# Altium PCB Greenhouse.PcbDoc (part 2 of 2)
Units mil, origin at the board's own origin, x right, y up, seen from the top; angles counter-clockwise.
Board outline 3900 x 3775 mil, 2 copper layers (Top Layer, Bottom Layer); 118 components, 76 nets, 461 pads, 55 vias.
Unrouted connection lines stored in the file: 2.
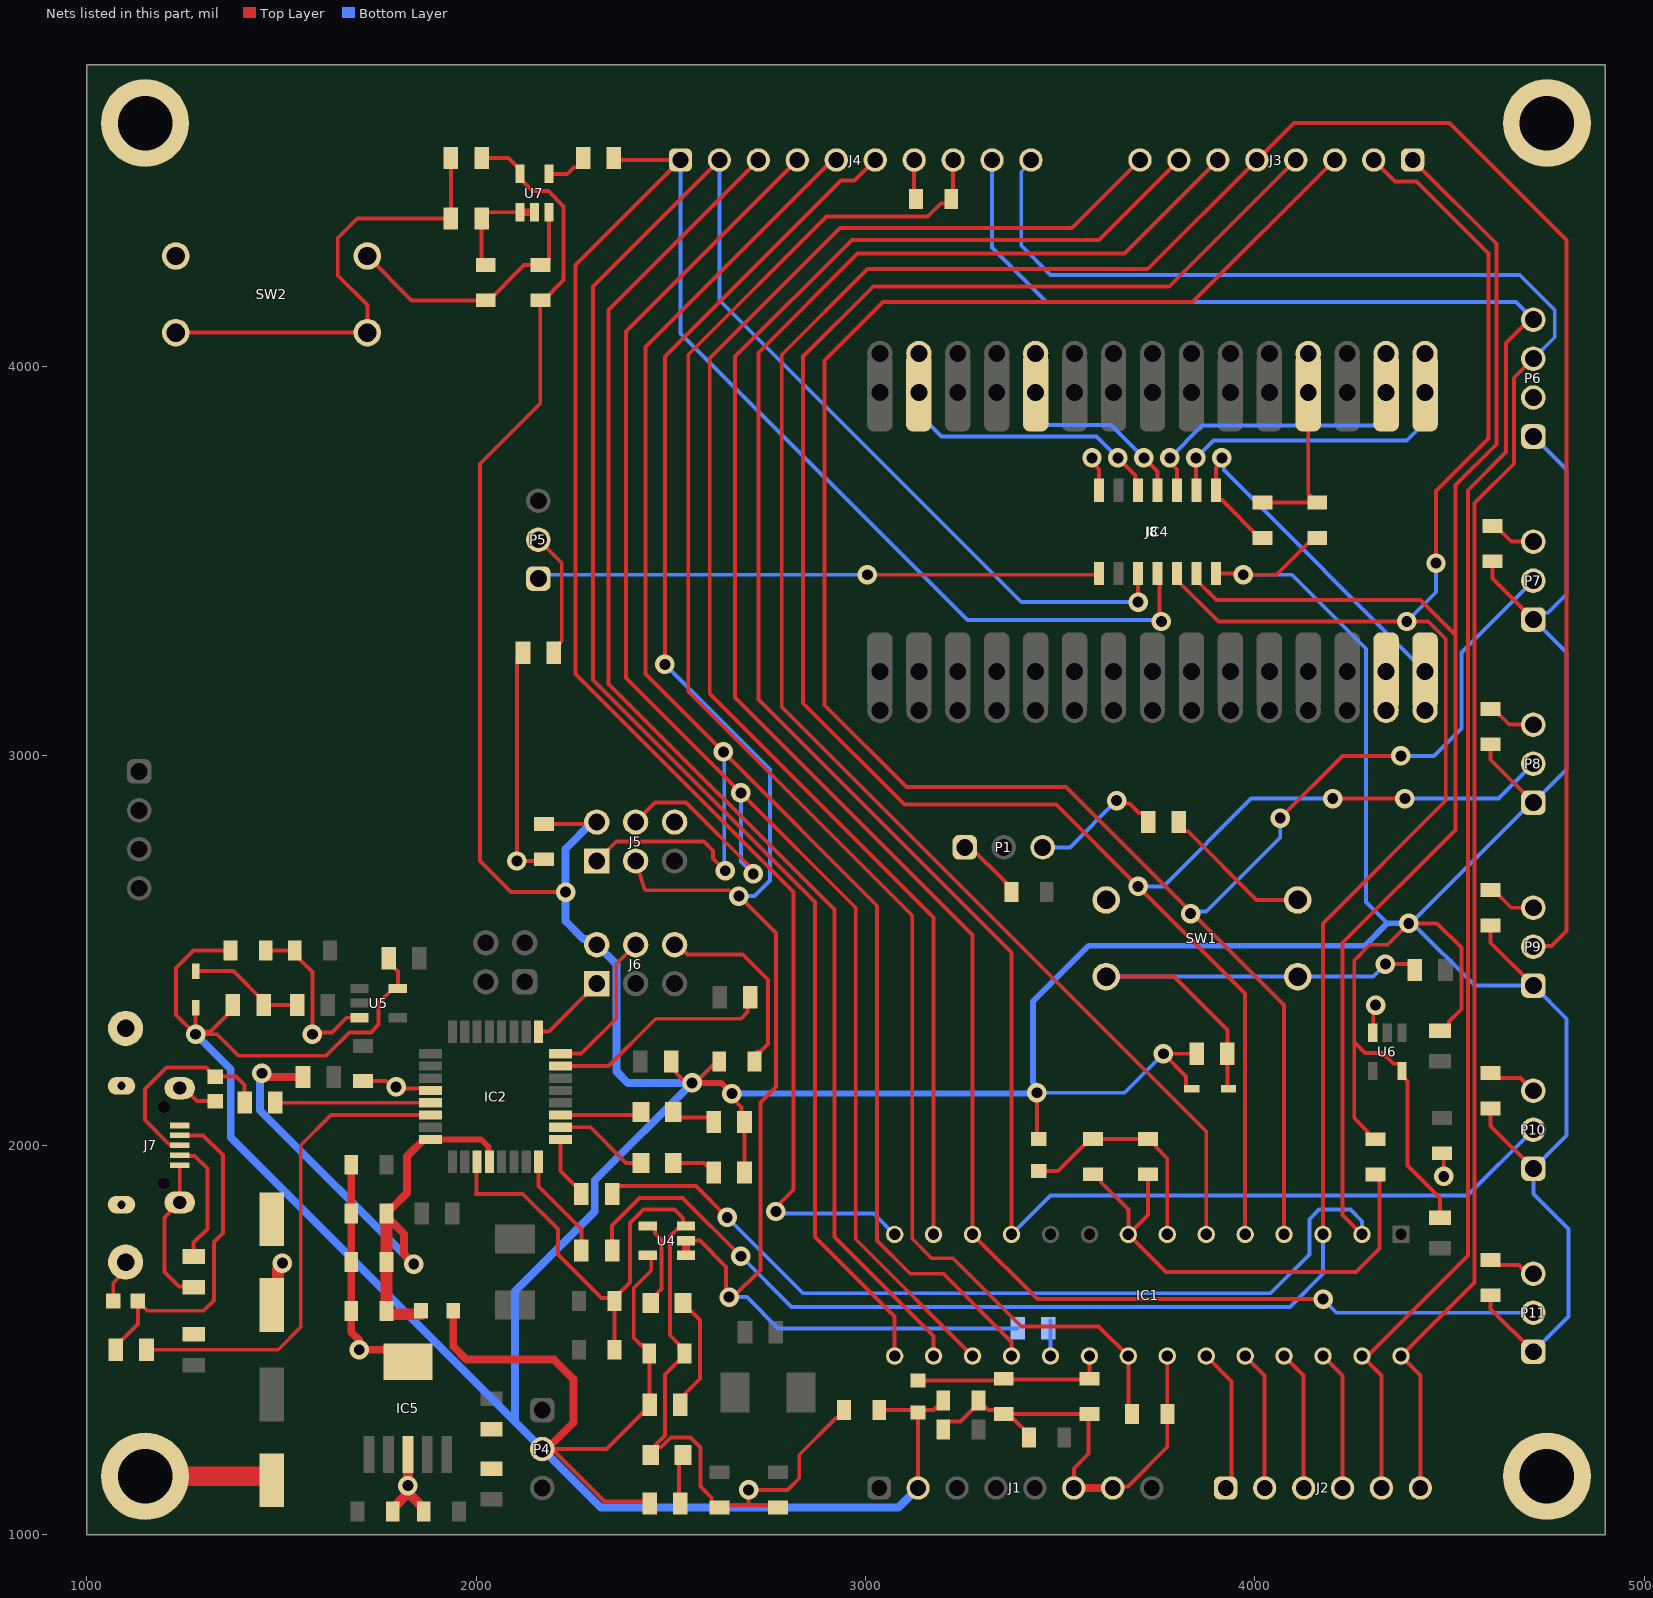
[diagram p2: the nets of this part, all layers, seen from the top]

## Via types
v1: diameter 50, hole 28, Top Layer to Bottom Layer, 55 vias

## Nets (pads, with @x,y where several pads share a name; then routed paths per layer and width w, separated by ;. In a path a pad name is that pad's centre, name@x,y a point inside that pad or via, vN(x,y) a via of type N, cw(c..) or ccw(c..) an arc to the next point about the centre after c; other vN are vias at no path point) (continued)
+5V/3V3: C8.2 C15.2 C17.1 C26.2 C28.2 C29.2 C30.2 C34.2 C35.2 C37.2 C38.2 C39.2 C40.2 C41.2 D5.1 D6.1 FB1.1 FB2.1 FB3.1 IC4.14 J1.2 J5.02 J6.02 P4.2 P6.1 P7.1 P8.1 P9.1 P10.1 P11.1 R1.1 R2.1 R3.1 R4.1 R14.2 R15.1 R17.1 R18.2 R19.2 R20.2 R21.2 R27.1 R28.2 U4.5 U5.5 U6.5 U7.5 | length 20581.8
  Top Layer w10: D5.1@1280,2339.53 v1(1280,2285) ; C30.2@1369.72,2500 1275,2500 1230,2455 1230,2335 v1(1280,2285) ; R19.2@1375.63,2360 1375.63,2350.16 1318.13,2292.65 1287.65,2292.65 v1(1280,2285) ; R4.1@1775.63,2480 1775.63,2470.16 1799.21,2446.57 U5.5@1799.21,2402.4 1787.4,2402.4 1749.87,2364.87 1749.87,2309.87 1730,2290 1675,2290 1615,2230 1390,2230 1335,2285 v1(1280,2285) ; R21.2@2014.37,4535 2083.62,4535 2112.6,4506.02 U7.5@2112.6,4494.21 2112.6,4482.4 2145.01,4449.99 2185.61,4449.99 2225,4410.59 2225,4221.85 2172.87,4169.72 C29.2@2165,4169.72 2165,3905 2010,3750 2010,2730 2090,2650 v1(2230,2650) ; P4.2@2170,1220 P4.2@2195,1220 ; C17.1@2175,2825.28 2270.28,2825.28 ; 2255,2825 2305,2825 J5.02@2310,2830 J5.02@2310,2844.87 ; U4.5@2440.79,1717.6 2443.19,1717.6 2450,1710.79 2450,1678.56 2405,1633.56 2405,1505.63 2425.04,1485.59 2432.01,1485.59 2445.63,1471.97 R15.1@2445.63,1333.56 2445.63,1330.16 2335.47,1220 P4.2@2195,1220 ; R17.1@2442.18,1085 2330,1085 P4.2@2195,1220 ; R1.1@2504.37,2208.7 2504.37,2195.16 v1@2531.87,2167.65 ; v1(2555,2160) 2562.6,2160 2614.72,2212.13 C8.2@2614.72,2220 ; v1@2664.84,2114.34 2681.49,2097.69 2681.49,2077.72 2689.37,2069.84 R2.1@2689.37,2060 R3.1@2689.37,1930 ; C34.2@3035.28,1320 3128.66,1320 FB3.1@3135,1313.66 3141.34,1320 3174.72,1320 C15.2@3199.72,1345 ; J1.2@3135,1120 FB3.1@3135,1303.66 ; v1(3440,2135) 3440,2021.34 FB2.1@3445,2016.34 ; D6.1@3837.76,2145 3827.91,2145 3823.07,2149.84 3823.07,2176.93 v1(3765,2235) R20.2@3850.63,2235 ; IC4.14@3907.8,3493.25 3900,3485.45 IC4.14@3900,3468.23 v1@3988.78,3468.23 ; v1(3970,3465) 4055,3465 4137.01,3547.01 4147.28,3547.01 C35.2@4160,3559.72 ; C28.2@4310,2015.28 4302.13,2015.28 4289.41,2027.99 4289.41,2035.87 4255,2070.28 4255,2265 ; R14.2@4475,1814.37 4475,1865 4392,1948 4392,2164.38 4377.4,2178.98 U6.5@4377.4,2190.79 4377.4,2202.6 4370.59,2209.41 4355.59,2209.41 4327.8,2237.2 4282.8,2237.2 4255,2265 ; R18.2@4475,2294.37 4484.84,2294.37 4498.54,2308.07 4498.54,2317.91 4530,2349.37 4530,2508 4468,2570 v1(4395,2570) 4340,2515 4295,2515 4255,2475 4255,2265 ; C41.2@4605,1614.72 4605,1580 P11.1@4715,1470 ; C40.2@4605,2094.72 4605,2050 P10.1@4715,1940 ; C39.2@4605,2564.72 4605,2520 P9.1@4715,2410 ; C38.2@4605,3029.72 4605,2990 P8.1@4715,2880 ; C37.2@4610,3499.72 4610,3455 P7.1@4715,3350
  Top Layer w15: v1@2562.6,2160 2630,2160 v1(2657.19,2132.82)
  Top Layer w20: FB1.1@1941.34,1575 1941.34,1483.66 1975,1450 2200,1450 2250,1400 2250,1287.5 2199.73,1237.23
  Bottom Layer w10: v1(3440,2135) 3665,2135 v1(3765,2235) ; v1(3970,3465) 4095,3465 4285,3275 4285,2625 4340,2570 ; v1(4395,2570) v1@4400,2570 ; P11.1@4715,1470 4805,1560 4805,1785 4715,1875 P10.1@4715,1940 4800,2025 4800,2325 P9.1@4715,2410 4565,2410 4405,2570 v1@4400,2570 ; P6.1@4715,3820 4800,3735 4800,3415 4752.49,3367.49 4732.49,3367.49 P7.1@4715,3350 4800,3265 4800,2965 P8.1@4715,2880 4710,2880 v1@4400,2570
  Bottom Layer w15: v1(2657.19,2132.82) v1@3440,2132.82 ; v1(3440,2135) 3433.3,2141.7 3433.3,2157.98 3430,2161.29 3430,2370 3572.5,2512.5 4282.5,2512.5 4340,2570 v1(4395,2570)
  Bottom Layer w20: v1(1280,2285) 1370,2195 1370,2020 2100,1290 ; J5.02@2310,2830 2298.51,2830 2230,2761.49 v1(2230,2650) 2230,2575.45 2276.05,2529.41 2283.43,2529.41 2297.83,2515 J6.02@2310,2515 2360.52,2464.48 2360.52,2189.48 2390,2160 v1(2555,2160) 2305,1910 2305,1830 2100,1625 2100,1290 ; J1.2@3135,1120 3085,1070 2320,1070 P4.2@2170,1220 2100,1290
+5V/3V3_16U2: C3.2 C4.2 C5.2 FB1.2 IC2.4 IC2.32 R26.2 | length 1691.4
  Top Layer w10: C3.2@1770.28,1575 C3.2@1778.94,1566.34 ; C5.2@1770.28,1817.13 C5.2@1770.28,1825 ; IC2.4@2031.9,1974.12 2041.06,1964.96 IC2.4@2034.25,1958.15
  Top Layer w15: IC2.32@1883.15,2014.76 2013.47,2014.76 2031.9,1996.33 IC2.4@2031.9,1974.12
  Top Layer w20: v1(1450,2185) 1458.12,2185 1468.12,2175 R26.2@1555.63,2175 ; C5.2@1770.28,1817.13 1815,1772.4 1815,1721.72 1840,1696.72 v1(1840,1695) ; C5.2@1770.28,1825 1770.28,1832.87 1777.99,1840.59 1785.87,1840.59 1822.8,1877.53 1822.8,1971.64 1864.11,2012.95 1881.34,2012.95 IC2.32@1883.15,2014.76
  Top Layer w30: C3.2@1770.28,1575 C4.2@1770.28,1700 1770.28,1797.64 ; C3.2@1778.94,1566.34 FB1.2@1858.66,1566.34
  Bottom Layer w20: v1(1450,2185) 1445,2180 1445,2090 v1(1840,1695)
+5V/3V3_328P_AVCC: C22.2 C23.2 FB3.2 IC1.20 | length 512.9
  Top Layer w10: FB3.2@3135,1396.34 3351.06,1396.34 C22.2@3353.03,1398.31 ; C22.2@3355,1400.28 C22.2@3353.03,1398.31 ; C23.2@3575,1390.28 IC1.20@3575,1458.74 ; C23.2@3575,1400.28 3573.03,1398.31 C22.2@3353.03,1398.31
+5V/3V3_328P_VCC: C19.2 C20.2 FB2.2 IC1.7 | length 584.6
  Top Layer w10: FB2.2@3445,1933.66 3493.96,1933.66 3576.63,2016.34 C19.2@3584.51,2016.34 C20.2@3725,2016.34 3732.87,2016.34 3745.59,2003.62 3745.59,1995.75 3775,1966.34 IC1.7@3775,1771.26
+5V_USB: C1.1 J7.1 L1.1 | length 25.5
  Top Layer w20: L1.1@1275,1514.37 1284.84,1514.37 L1.1@1293.54,1523.07 ; C1.1@1472.62,1807.86 C1.1@1475,1810.24
+AREF: C21.2 C24.1 IC1.21 J4.8 | length 4292
  Top Layer w10: C21.2@3220.28,4430 3208.69,4418.42 3193.42,4418.42 3160,4385 2900,4385 2545,4030 2545,3165 3120,2590 3120,1760 3170,1710 3225,1710 3400,1535 3598.74,1535 IC1.21@3675,1458.74 3675,1319.72 C24.1@3684.72,1310 ; C21.2@3225,4419.72 3225,4430 J4.8@3225,4530
AD0: IC1.23 J2.1 | length 371.9
  Top Layer w10: IC1.23@3875,1458.74 3940,1393.74 3940,1135 J2.1@3925,1120
AD1: IC1.24 J2.2 | length 359.5
  Top Layer w10: IC1.24@3975,1458.74 4025,1408.74 J2.2@4025,1120
AD2: IC1.25 J2.3 | length 359.5
  Top Layer w10: IC1.25@4075,1458.74 4125,1408.74 J2.3@4125,1120
AD3: IC1.26 J2.4 | length 359.5
  Top Layer w10: IC1.26@4175,1458.74 4225,1408.74 J2.4@4225,1120
AD4/SDA: IC1.27 J2.5 J4.9 P6.4 | length 4908.5
  Top Layer w10: J2.5@4325,1120 4325,1408.74 IC1.27@4275,1458.74 4281.62,1465.36 4295.36,1465.36 4547,1717 4547,3682 4645,3780 4645,4060 4705,4120 P6.4@4715,4120
  Bottom Layer w10: J4.9@3325,4530 3325,4305 3465,4165 4670,4165 P6.4@4715,4120
AD5/SCL: IC1.28 J2.6 J4.10 P6.3 | length 4878.6
  Top Layer w10: J2.6@4425,1120 4425,1408.74 IC1.28@4375,1458.74 4564,1647.74 4564,3649 4665,3750 4665,3970.96 4714.04,4020 P6.3@4715,4020
  Bottom Layer w10: J4.10@3425,4530 3425,4524.76 3400,4499.76 3400,4310 3475,4235 4680,4235 4770,4145 4770,4075 P6.3@4715,4020
BUTTON_RESETn: D6.2 R20.1 R24.1 SW1.B1 SW1.B2 | length 1333.6
  Top Layer w10: SW1.B1@3617.87,2433.15 3791.85,2433.15 3929.37,2295.63 R20.1@3929.37,2235 3929.37,2147.87 D6.2@3932.24,2145 ; v1(4335,2465) 4396.93,2465 4410.63,2451.3 R24.1@4410.63,2450
  Bottom Layer w10: SW1.B1@3617.87,2433.15 SW1.B2@4110,2433.15 4303.89,2433.15 4335,2464.26 v1(4335,2465)
CON_USB_N: IC2.30 J7.2 R6.1 R6.2 VR1.2 | length 2166.7
  Top Layer w10: R6.1@1060.63,1489.37 R6.1@1075,1475 1075,1484.84 1131.5,1541.34 VR1.2@1131.5,1599.02 ; VR1.2@1131.5,1600 VR1.2@1131.5,1599.02 ; R6.2@1139.37,1475 R6.2@1153.74,1475 1492,1475 1550,1533 1550,2000 1627.76,2077.76 IC2.30@1883.15,2077.76 ; J7.2@1239.17,2025.59 1299.41,2025.59 1350,1975 1350,1775 1326.79,1751.79 1326.79,1601.79 1300,1575 1156.5,1575 1146.18,1585.31 1145.2,1585.31 VR1.2@1131.5,1599.02
CON_USB_P: IC2.29 J7.3 R7.1 R7.2 VR2.2 | length 937.6
  Top Layer w10: J7.3@1239.17,2000 1236.67,2002.5 1212.29,2002.5 1150,2064.79 1150,2145 1205,2200 1306.5,2200 1315.31,2191.18 1315.31,2190.2 1329.02,2176.5 1383.5,2176.5 1405.63,2154.37 R7.1@1405.63,2110 ; R7.2@1484.37,2110 1485.12,2109.25 IC2.29@1883.15,2109.25
GND: C1.2 C2.2 C3.1 C4.1 C5.1 C6.1 C7.1 C8.1 C9.1 C10.1 C12.1 C13.1 C14.1 C15.1 C16.1 C17.2 C19.1 C20.1 C21.1 C22.1 C23.1 C24.2 C25.1 C26.1 C27.1 C28.1 C29.1 C30.1 C31.1 C32.1 C33.1 C34.1 C35.1 C36.2 C37.1 C38.1 C39.1 C40.1 C41.1 D1.1 IC1.8 IC1.22 IC2.3 IC2.28 IC4.7 IC5.3 IC5.6 J1.6 J1.7 J4.7 J5.06 J6.06 J7.5 J7.Shell J8.6 MH1.1 MH2.1 MH3.1 MH4.1 MS1.1 MS2.1 P6.2 P7.3 P8.3 P9.3 P10.3 P11.3 R8.1 R12.1 R29.1 SW1.A1 SW1.A2 SW2.A1 SW2.A2 U4.3 U5.3 U6.3 U7.3 VR1.1 VR2.1 | length 11367.5
  Top Layer w10: VR1.1@1068.5,1600 1068.5,1646.86 1100,1678.35 MS1.1@1100,1700 ; MS2.1@1100,2300 MS2.1@1100,2321.65 ; J7.5@1239.17,1948.82 J7.Shell@1239.17,1853.35 1200,1814.17 1200,1675 1237.31,1637.69 1272.94,1637.69 R8.1@1275,1635.63 ; J7.Shell@1239.17,2146.65 1250,2146.65 1283.15,2113.5 VR2.1@1330,2113.5 ; C30.1@1460.28,2500 C31.1@1534.72,2500 1547.44,2487.28 1547.44,2477.56 1580,2445 v1(1580,2285) 1584.8,2289.8 1629.8,2289.8 1667.6,2327.6 U5.3@1700.79,2327.6 ; C2.2@1473.5,1150 1475,1148.5 C2.2@1475,1139.76 C2.2@1479.37,1144.13 ; C1.2@1475,1589.76 C1.2@1485.24,1600 ; v1(1700,1475) 1700,1500 ; C7.1@1710,2164.72 1769.45,2164.72 1784.18,2150 v1(1795,2150) 1799.63,2145.37 1878.52,2145.37 IC2.28@1883.15,2140.75 ; SW2.A2@1721.06,4283.43 1834.76,4169.72 C33.1@2025,4169.72 2032.87,4169.72 2123.43,4260.28 C29.1@2165,4260.28 2172.87,4260.28 2187.4,4274.8 U7.3@2187.4,4395.79 ; C12.1@1786.28,1060 C12.1@1786.28,1067.87 ; IC5.6@1794.09,1475 IC5.6@1825,1444.09 ; 1817.35,1098.94 1817.35,1118.35 v1(1825,1126) 1832.65,1118.35 1832.65,1100.94 ; C13.1@1865.72,1060 C13.1@1865.72,1067.87 ; IC2.3@2002.76,1958.15 2001.38,1956.77 2001.38,1876.38 2000,1875 2120,1875 2210,1785 2210,1720 2322,1608 2347.28,1608 C9.1@2355.28,1600 ; R29.1@2120.63,3265 2106.93,3251.3 2106.93,3237.53 2105,3235.6 v1(2105,2730) C17.2@2170.28,2730 ; C10.1@2355.28,1475 C9.1@2355.28,1600 ; D1.1@2443.66,1210 2443.66,1213.94 2485,1255.28 2485,1411.85 2535.28,1462.13 C26.1@2535.28,1465 2522.56,1477.72 2522.56,1487.44 2497.68,1512.32 2497.68,1765.88 2517.4,1785.59 2520.59,1785.59 2527.4,1792.4 U4.3@2538.46,1792.4 ; D1.1@2448.66,1205 2448.66,1208.94 2465.32,1225.59 2475.59,1225.59 2500,1250 2550.55,1250 2576.2,1224.35 2576.2,1123.8 2605.38,1094.62 2605.38,1082.44 2618.09,1069.72 C27.1@2625,1069.72 2627.64,1072.36 2630.28,1075 2700,1075 ; J6.06@2510,2515 2518.34,2515 2543.34,2490 2685,2490 2750,2425 2750,2259.72 2730.87,2240.59 2722.99,2240.59 ; U4.3@2539.21,1792.4 U4.3@2538.46,1792.4 ; C25.1@2775,1069.72 2769.72,1075 2700,1075 ; C34.1@2944.72,1320 2944.72,1312.13 2932.01,1299.41 2924.13,1299.41 2830,1205.28 2830,1145 2800,1115 v1(2700,1115) 2700,1075 ; J4.7@3125,4530 3125,4419.72 C21.1@3129.72,4415 ; C16.1@3199.72,1270 3199.72,1277.87 3212.44,1290.59 3243.74,1290.59 3290.28,1337.13 C15.1@3290.28,1345 3315.28,1320 3344.72,1320 C22.1@3355,1309.72 3367.72,1297.01 3380.59,1297.01 3419.72,1257.87 C14.1@3419.72,1250 ; C22.1@3355,1310 C23.1@3572.87,1310 ; J1.6@3535,1120 3535,1170 3572.87,1207.87 C23.1@3572.87,1300 ; v1(3581.67,3765) 3581.67,3754.18 3600,3735.84 IC4.7@3600,3681.77 ; C19.1@3584.51,1925.79 3592.38,1925.79 3605.1,1913.07 3605.1,1905.2 3675,1835.3 IC1.8@3675,1771.26 ; J1.7@3635,1120 3639.06,1124.06 3674.06,1124.06 3775,1225 IC1.22@3775,1458.74 ; C20.1@3725,1925.79 3725,1821.26 IC1.8@3675,1771.26 ; R12.1@3804.37,2830 3804.37,2820.16 3818.07,2806.46 3827.91,2806.46 4004.37,2630 SW1.A2@4110,2630 ; C36.2@4020,3650.28 C35.1@4160,3650.28 4137.01,3673.27 J8.6@4137.01,3933.27 ; U6.3@4303.8,2300.41 v1@4303.8,2353.8 ; C28.1@4310,1924.72 4320,1914.72 4320,1735 4260,1675 3771.26,1675 IC1.8@3675,1771.26 ; C32.1@4480,1979.72 4485,1974.72 v1(4485,1920) ; C41.1@4605,1705.28 4617.72,1692.56 4678.1,1692.56 4700.66,1670 P11.3@4715,1670 ; C40.1@4605,2185.28 4610.28,2185.28 4615,2190 4615,2183.15 4625.59,2172.56 4681.8,2172.56 4714.36,2140 P10.3@4715,2140 ; C39.1@4605,2655.28 4612.87,2655.28 4658.15,2610 P9.3@4715,2610 ; C38.1@4605,3120.28 4612.87,3120.28 4653.15,3080 P8.3@4715,3080 ; C37.1@4610,3590.28 4617.87,3590.28 4658.15,3550 P7.3@4715,3550 ; C9.1@2355.28,1600 2355.28,1607.87 2395,1647.6 2395,1800 2430,1835 2510,1835 2531.65,1813.35 2531.65,1799.21 U4.3@2538.46,1792.4 ; 2722.99,2240.59 2710.28,2227.87 2710.28,2220 2722.99,2240.59
  Top Layer w20: C6.1@1679.72,1950 C5.1@1679.72,1825 C4.1@1679.72,1700 C3.1@1679.72,1575 1679.72,1520.28 1700,1500 ; v1(1700,1475) IC5.6@1794.09,1475 ; J1.6@3535,1120 J1.7@3635,1120
  Top Layer w25: C12.1@1786.28,1067.87 1817.35,1098.94 ; v1(1825,1126) IC5.3@1825,1205.91 ; 1832.65,1100.94 C13.1@1865.72,1067.87
  Top Layer w30: C1.2@1485.24,1600 1491.5,1606.26 1491.5,1680.83 1502.63,1691.96 v1(1502.63,1697.37)
  Top Layer w50: MH1.1@1150,1150 C2.2@1473.5,1150
  other v1: 4310,2360
IO0: IC1.2 IC4.13 J3.1 R10.2 | length 6012.2
  Top Layer w10: R10.2@2349.37,1875 2349.37,1881.3 2363.07,1895 2565,1895 v1(2645,1815) ; IC4.13@3850,3468.23 3850,3451 3901,3400 4425,3400 4515,3310 ; IC1.2@4275,1771.26 4225,1821.26 4225,2520 4515,2810 4515,3310 ; J3.1@4404.92,4530 4620,4314.92 4620,3800 4515,3695 4515,3310
  Bottom Layer w10: v1(2645,1815) 2840,1620 4040,1620 4140,1720 4140,1810 4165,1835 4245,1835 4275,1805 IC1.2@4275,1771.26
IO1: IC1.3 IC4.12 J3.2 R11.2 | length 6027.2
  Top Layer w10: R11.2@2349.37,1730 2349.37,1794.37 2420,1865 2530,1865 v1(2680,1715) ; IC4.12@3800,3468.23 3800,3451 3906,3345 v1(4390,3345) 4445,3345 4490,3300 4490,2885 4175,2570 IC1.3@4175,1771.26 ; J3.2@4304.92,4530 4359.92,4475 4415,4475 4600,4290 4600,3815 4465,3680 v1(4465,3495)
  Bottom Layer w10: v1(2680,1715) 2810,1585 4090,1585 4175,1670 IC1.3@4175,1771.26 ; v1(4390,3345) 4465,3420 v1(4465,3495)
IO2: IC1.4 J3.3 P7.2 | length 5876.5
  Top Layer w10: v1(4065,2840) 4225,3000 v1(4375,3000) ; IC1.4@4075,1771.26 4075,2360 3840,2595 v1(3835,2595) 3835,2600 3515,2920 3105,2920 2895,3130 2895,4015 3045,4165 3839.92,4165 J3.3@4204.92,4530
  Bottom Layer w10: v1(3835,2595) 3840,2600 3875,2600 4065,2790 v1(4065,2840) ; v1(4375,3000) 4460,3000 4530,3070 4530,3265 P7.2@4715,3450
IO3: IC1.5 J3.4 P8.2 | length 5571.9
  Top Layer w10: IC1.5@3975,1771.26 3975,2390 v1(3700,2665) 3490,2875 3100,2875 2840,3135 2840,4025 3020,4205 3779.92,4205 J3.4@4104.92,4530 ; v1(4200,2890) v1(4385,2890)
  Bottom Layer w10: v1(3700,2665) 3765,2665 3990,2890 v1(4200,2890) ; v1(4385,2890) 4625,2890 P8.2@4715,2980
IO4: IC1.6 J3.5 P9.2 | length 6972.5
  Top Layer w10: IC1.6@3875,1771.26 3875,2035 2785,3125 2785,4030 3005,4250 3724.92,4250 J3.5@4004.92,4530 4099.92,4625 4500,4625 4800,4325 4800,2550 4761.5,2511.5 4716.5,2511.5 P9.2@4715,2510
IO5: IC1.11 J3.6 P10.2 | length 5369.3
  Top Layer w10: IC1.11@3375,1771.26 3375,2495 2725,3145 2725,4035 2980,4290 3664.92,4290 J3.6@3904.92,4530
  Bottom Layer w10: IC1.11@3375,1771.26 3475,1871.26 4546.26,1871.26 P10.2@4715,2040
IO6: IC1.12 J3.7 P11.2 | length 5378.9
  Top Layer w10: J3.7@3804.92,4530 3599.92,4325 2965,4325 2665,4025 2665,3150 3275,2540 IC1.12@3275,1771.26 3441.26,1605 v1(4175,1605)
  Bottom Layer w10: v1(4175,1605) 4210,1570 P11.2@4715,1570
IO7: IC1.13 J3.8 | length 3803.1
  Top Layer w10: IC1.13@3175,1771.26 3175,2585 2600,3160 2600,4020 2935,4355 3529.92,4355 J3.8@3704.92,4530
IO8: IC1.14 IC4.11 J4.1 R22.2 | length 5679
  Top Layer w10: R22.2@2353.74,4535 2358.74,4530 J4.1@2525,4530 2255,4260 2255,3210 2815,2650 2815,1885.82 2770,1840.82 v1(2770,1830) ; IC4.11@3750,3468.23 3755,3463.23 3755,3350 v1(3760,3345)
  Bottom Layer w10: J4.1@2525,4530 2525,4085 3261.57,3348.43 3756.57,3348.43 v1(3760,3345) ; v1(2770,1830) 2775,1825 3021.26,1825 IC1.14@3075,1771.26
IO9: IC1.15 IC4.10 J4.2 | length 5356.1
  Top Layer w10: J4.2@2625,4530 2300,4205 2300,3195 2870,2625 2870,1765 3075,1560 IC1.15@3075,1458.74 ; v1(3700,3395) IC4.10@3700,3468.23
  Bottom Layer w10: J4.2@2625,4530 2625,4170 3400,3395 v1(3700,3395)
LVL_A1: IC4.2 J8.2 | length 804.2
  Top Layer w10: v1(3848.33,3765) 3849.17,3764.17 3849.17,3682.61 IC4.2@3850,3681.77 IC4.2@3850,3699
  Bottom Layer w10: v1(3848.33,3765) 3893.33,3810 4390,3810 4437.01,3857.01 J8.2@4437.01,3933.27
LVL_A2: IC4.3 J8.3 | length 745.9
  Top Layer w10: v1(3781.67,3765) 3781.67,3754.18 3800,3735.84 IC4.3@3800,3681.77
  Bottom Layer w10: v1(3781.67,3765) 3864.55,3847.88 4302.88,3847.88 4337.01,3882.01 J8.3@4337.01,3933.27
LVL_A3: IC4.4 J8.4 | length 474.9
  Top Layer w10: v1(3715,3765) 3750,3730 IC4.4@3750,3681.77
  Bottom Layer w10: J8.4@3437.01,3933.27 3437.01,3882.99 3470,3850 3630,3850 v1(3715,3765)
LVL_A4: IC4.5 J8.5 | length 718
  Top Layer w10: v1(3648.33,3765) 3676.8,3736.53 3693.77,3719.57 3693.77,3688 IC4.5@3700,3681.77
  Bottom Layer w10: J8.5@3137.01,3933.27 3137.01,3877.99 3195,3820 3593.33,3820 v1(3648.33,3765)
LVL_VCCA: C36.1 IC4.1 J8.1 | length 1034.6
  Top Layer w10: v1(3915,3765) 3915,3754.18 3900,3739.18 IC4.1@3900,3681.77 3900,3664.55 3907.8,3656.75 3915.1,3656.75 4012.13,3559.72 C36.1@4020,3559.72
  Bottom Layer w10: v1(3915,3765) 3920.15,3759.85 3920.15,3733.59 J8.1@4437.01,3216.73
MISO: IC1.18 J4.5 J5.01 | length 4419.8
  Top Layer w10: J5.01@2310,2730 2360,2780 2585,2780 2608.67,2756.33 2608.67,2736.33 v1(2640,2705) ; J4.5@2925,4530 2915,4530 2435,4050 2435,3210 v1(2635,3010) 3030,2615 3030,1755 3115,1670 3200,1670 3375,1495 IC1.18@3375,1458.74
  Bottom Layer w10: v1(2635,3010) 2637.5,3007.5 2637.5,2707.5 v1(2640,2705)
MOSI: IC1.17 J4.4 J5.04 | length 4248.3
  Top Layer w10: J5.04@2410,2830 2460,2880 2539.26,2880 2711.72,2707.54 v1(2711.72,2696.72) ; J4.4@2825,4530 2385,4090 2385,3200 v1(2680,2905) 2975,2610 2975,1758.74 IC1.17@3275,1458.74
  Bottom Layer w10: v1(2680,2905) 2680,2728.43 v1(2711.72,2696.72)
NetC11_1: C11.1 P1.1 | length 179
  Top Layer w10: P1.1@3262.5,2772.5 3362.01,2672.99 3362.01,2652.72 C11.1@3374.72,2640
NetD1_2: D1.2 R17.2 | length 127.2
  Top Layer w10: R17.2@2520.93,1085 2520.93,1204.59 D1.2@2526.34,1210
NetD2_1: D2.1 U4.4 | length 230.4
  Top Layer w10: U4.4@2440.79,1792.4 2452.3,1792.4 2459.11,1785.59 2459.11,1774.08 2476.41,1756.78 2476.41,1631.41 2465.32,1620.32 2465.32,1611.65 D2.1@2448.66,1595
NetD2_2: D2.2 R15.2 | length 296.4
  Top Layer w10: R15.2@2524.37,1340 2524.37,1349.84 2575,1400.47 2575,1551.34 2551.93,1574.41 2547.99,1574.41 2531.34,1591.06 D2.2@2531.34,1595
NetD3_1: D3.1 IC2.11 | length 209.8
  Top Layer w10: IC2.11@2216.85,2077.76 2416.42,2077.76 D3.1@2423.66,2085
NetD3_2: D3.2 R2.2 | length 114.6
  Top Layer w10: D3.2@2506.34,2085 2520.04,2071.3 2599.33,2071.3 R2.2@2610.63,2060
NetD4_1: D4.1 IC2.10 | length 244.6
  Top Layer w10: IC2.10@2216.85,2046.26 2293.74,2046.26 2385,1955 D4.1@2423.66,1955
NetD4_2: D4.2 R3.2 | length 114.6
  Top Layer w10: D4.2@2506.34,1955 2585.63,1955 R3.2@2610.63,1930
NetD5_2: D5.2 R19.1 R23.1 | length 329.1
  Top Layer w10: D5.2@1284.84,2461.93 1280,2457.09 D5.2@1280,2447.24 1376.97,2447.24 1454.37,2369.84 R19.1@1454.37,2360 R23.1@1540.63,2360 R23.1@1540.63,2369.84
NetIC2_8: IC2.8 R11.1 | length 279.2
  Top Layer w10: IC2.8@2160.24,1958.15 2160.24,1894.76 2270.63,1784.37 R11.1@2270.63,1730 ; R11.1@2266.86,1710.22 R11.1@2270.63,1706.46
NetIC2_9: IC2.9 R10.1 | length 167
  Top Layer w10: IC2.9@2216.85,2014.76 2216.85,1933.62 2270.63,1879.84 R10.1@2270.63,1870
NetIC2_15: IC2.15 R5.2 | length 578.5
  Top Layer w10: IC2.15@2216.85,2203.74 2340.16,2203.74 2461.42,2325 2680,2325 2697.31,2342.31 2697.31,2372.94 R5.2@2704.37,2380
NetIC2_16: IC2.16 J6.04 | length 391
  Top Layer w10: IC2.16@2216.85,2235.24 2270.24,2235.24 2360,2325 2360,2465 J6.04@2410,2515
NetIC2_17: IC2.17 J6.01 | length 200.8
  Top Layer w10: IC2.17@2160.24,2291.85 2186.85,2291.85 J6.01@2310,2415
NetIC4_8: IC4.8 P5.1 | length 1445.5
  Top Layer w10: v1(3005,3465) 3596.77,3465 IC4.8@3600,3468.23
  Bottom Layer w10: P5.1@2160,3455 2170,3465 v1(3005,3465)
NetJ7_4: J7.4 R8.2 | length 325.2
  Top Layer w10: J7.4@1239.17,1974.41 1241.36,1972.23 1277.77,1972.23 1310,1940 1310,1785 1275,1750 R8.2@1275,1714.37
NetP1_3: P1.3 R12.2 | length 348.9
  Top Layer w10: v1(3645,2885) 3652.65,2877.35 3678.28,2877.35 3702.09,2853.54 3711.93,2853.54 3725.63,2839.84 R12.2@3725.63,2830
  Bottom Layer w10: P1.3@3455,2765 3525,2765 v1(3645,2885)
NetP5_2: P5.2 R29.2 | length 324
  Top Layer w10: P5.2@2160,3555 2220,3495 2220,3294.4 2214.14,3288.54 2213.07,3288.54 2199.37,3274.84 R29.2@2199.37,3265
NetR22_1: R22.1 U7.4 | length 110.3
  Top Layer w10: U7.4@2187.4,4494.21 2234.21,4494.21 2251.46,4511.46 2261.3,4511.46 2275,4525.16 R22.1@2275,4535
SCK: J4.6 J5.03 R13.2 U4.1 U4.2 | length 4775.2
  Top Layer w10: J5.03@2410,2730 2432.21,2659.66 2436.87,2655 2649.18,2655 2664.18,2640 v1(2675,2640) 2770,2545 2770,2150 2730,2110 2730,1680 2660,1610 v1(2650,1610) 2642.35,1617.65 2642.35,1687.65 2575,1755 U4.2@2539.21,1755 ; v1(2485,3235) 2485,4025 2936.99,4476.99 2971.99,4476.99 J4.6@3025,4530
  Top Layer w20: U4.1@2539.21,1717.6 U4.2@2539.21,1755
  Bottom Layer w10: v1(2485,3235) 2755,2965 2755,2680 2715,2640 v1(2675,2640) ; v1(2650,1610) 2695.85,1610 2775.85,1530 R13.2@3390.63,1530
SCK_R: IC1.19 R13.1 | length 91.9
  Bottom Layer w10: IC1.19@3475,1458.74 R13.1@3475,1550.63
SS: IC1.16 J4.3 | length 3576.6
  Top Layer w10: J4.3@2725,4530 2658.74,4463.74 2340,4145 2340,3185 2920,2605 2920,1765 3175,1510 IC1.16@3175,1458.74
USER_BUTTON: R21.1 R25.1 SW2.B1 SW2.B2 | length 1233.4
  Top Layer w10: SW2.B1@1228.94,4086.57 SW2.B2@1721.06,4086.57 1721.06,4157.63 1645,4233.7 1645,4330 1695,4380 R25.1@1935.63,4380 R21.1@1935.63,4535
USER_BUTTON_BUF: C33.2 R25.2 U7.1 U7.2 | length 267.5
  Top Layer w10: C33.2@2025,4260.28 2014.37,4270.91 R25.2@2014.37,4380 2014.37,4382.09 2028.07,4395.79 U7.1@2112.6,4395.79
  Top Layer w20: U7.1@2112.6,4395.79 U7.2@2150,4395.79
pads on no net: IC2.5 IC2.6 IC2.7 IC2.12 IC2.14 IC2.22 IC2.23 IC2.25 IC2.26 IC4.6 IC4.9 J1.1 J1.8 J7.MH1 J7.MH2 J8. P5.3

## Polygon pours and split planes (outlines as drawn)
GND on Bottom Layer "GND_PLANE" (solid, pour order 1): 975,4800 4900,4800 4925,4775 4925,975 1000,975 975,1000
GND on Bottom Layer "NONET_L-01_P-001" (solid, shelved, pour order 0): 1000,4500 1275,4775 4725,4775 4900,4600 4900,1250 4650,1000 1275,1000 1000,1275

## Other copper
Top Layer:
  region net +3V3: 1985,1125 1950,1160 1950,1256 1860,1256 1860,1150 1966,1044 2144,1044 2200,1100 2200,1125
  region net +5V/3V3: 2010,1150 2080,1150 2110,1180 2190,1180 2210,1200 2210,1240 2190,1260 2110,1260 2080,1290 2010,1290
  region net +5: 2200,1370 1550,1370 1670,1250 1690,1230 1710,1230 1789,1230 1789,1289 1820,1320 2200,1320
  region net +5: 1264,1454 1609,1454 1789,1274 1789,1160 1691.79,1062.79 1630.99,1108.81 1630.99,1194.01 1533,1292 1389,1292 1264,1417
  region net +5V_USB: 1248,1532 1294,1532 1350,1588 1350,1698 1467,1815 1507,1815 1507,1764 1400,1657 1400,1581 1315,1496 1257,1496 1248,1505 1248,1531
  region net +5V_USB: 1250,2044 1336,2044 1444,1936 1444,1864 1506,1864 1506,1949 1396,2059 1250,2059

## Silkscreen, mask and mechanical layers (free items; w line width, h text height)
Top Overlay:
  lines w10: 2310,1380 2340,1380 2400,1380 2400,1310 2400,1130 2400,1055 2310,1055 2250,1055 2250,1210 2320,1210 2320,1060 ; 1060,2585 1805,2585 1805,3055 1060,3055 1060,2585 ; 2075,3200 2850,3200 2850,3750 2075,3750 2075,3200 ; 2250,1230 2250,1380 2320,1380 2320,1230 2250,1230 ; 2750,2450 3550,2450 3550,2850 2750,2850 2750,2450 ; 3075,3375 3975,3375 3975,3825 3075,3825 3075,3375
  text "IO_8" at 2531.89,4603.11 h40 r45
  text "IO_9" at 2634,4603.11 h40 r45
  text "IO_7" at 3706.89,4603.11 h40 r45
  text "IO_6" at 3809,4603.11 h40 r45
  text "IO_5" at 3911.12,4603.11 h40 r45
  text "IO_4" at 4013.23,4603.11 h40 r45
  text "IO_3" at 4112.55,4603.11 h40 r45
  text "IO_2" at 4214.61,4603.11 h40 r45
  text "IO_1" at 4311.36,4603.11 h40 r45
  text "IO_0" at 4401.89,4603.11 h40 r45
  text "SS" at 2738.94,4600.29 h40 r45
  text "MOSI" at 2841.06,4600.29 h40 r45
  text "MISO" at 2940.37,4600.29 h40 r45
  text "SCK" at 3042.44,4600.29 h40 r45
  text "GND" at 3139.19,4600.29 h40 r45
  text "+AREF" at 3230,4600 h40 r45
  text "SDA" at 3339.19,4600.29 h40 r45
  text "SCL" at 3424.71,4600.29 h40 r45
  text "USER BUTTON" at 1325,4450.81 h80
  text "SDA" at 4791.89,4100.29 h40 r45
  text "SCL" at 4791.89,4000.29 h40 r45
  text "LCD" at 4649.19,3915 h80 r90
  text "GND" at 4791.89,3897.79 h40 r45
  text "+5/3v3" at 4791.86,3795.29 h40 r45
  text "DESIGN NOTE:" at 1060,3785 h40
  text "This board supports 5V or 3V3 voltage level on the IO pins:" at 1050,3709.29 h50
  text "1) 5V IO - Fit everything as defined in this schematic" at 1050,3648.14 h50
  text "LVL SHIFTER" at 3190.13,3625.81 h80
  text "with 16Mhz crystals" at 1050,3592.46 h50
  text "FOR SENSE BLE" at 3100,3562.14 h80
  text "JP5 -PULL DOWN OE" at 2257.56,3545.81 h80
  text "GND" at 4791.89,3530.29 h40 r45
  text "2) 3.3V IO - Remove R27, Fit R28, *Replace Y1 (change" at 1049.95,3509.29 h50
  text "LVLA = 3V3 ||  LVLB = 5V" at 3131.8,3509.19 h50
  text "Standard lvl shifter - Short 1 & 2" at 2257.56,3488.24 h50
  text "from 16MHz to 10MHz), *Replace Y2 (change from 16MHz to 8MHz)." at 1050,3459.29 h50
  text "IO_2" at 4791.89,3430.61 h40 r45
  text "Activate OE pin - Short 2 & 3" at 2257.56,3422.64 h50
  text "3) Both 5V and 3V3, selected through JP4 - Remove R27," at 1050,3384.29 h50
  text "Remove R28, Fit JP4," at 1050,3331.24 h50
  text "+5/3v3" at 4791.86,3325.29 h40 r45
  text "DHT11" at 4650,3290 h80 r90
  text "*Replace Y1 (change from 16MHz to 10MHz)," at 1050,3284.29 h50
  text "*Replace Y2 (change from 16MHz to 8MHz)." at 1050,3234.29 h50
  text "GND" at 4791.89,3060.29 h40 r45
  text "IO_3" at 4791.89,2960.61 h40 r45
  text "ICSP" at 2440,2895.81 h80
  text "JP3 - 16U2 MODE" at 1210,2870.81 h80
  text "+5/3v3" at 4791.86,2855.29 h40 r45
  text "5TE_1" at 4641.27,2820 h80 r90
  text "RESET BUTTON" at 3875,2800.81 h80
  text "DebugWire support - Short 1 & 2" at 1210,2797.21 h50
  text "ISP programmer mode - Short 2 & 3" at 1210,2725.48 h50
  text "ISP header - Short 3 & 4" at 1210,2665.74 h50
  text "JP1 - RESET MODE" at 2760,2620.81 h80
  text "GND" at 4791.89,2590.29 h40 r45
  text "ICSP1" at 2405,2585.81 h80
  text "Autoreset Enabled - Short 1 & 2" at 2760,2538.67 h50
  text "IO_4" at 4788.83,2490.61 h40 r45
  text "16U2 DFU mode Enabled - Short 2 & 3" at 2760,2466.94 h50
  text "+5/3v3" at 4791.86,2385.29 h40 r45
  text "5TE_2" at 4641.27,2350 h80 r90
  text "GND" at 4791.89,2120.29 h40 r45
  text "IO_5" at 4791.89,2020.61 h40 r45
  text "+5/3v3" at 4791.86,1915.29 h40 r45
  text "5TE_3" at 4641.27,1885 h80 r90
  text "GND" at 4791.89,1655.29 h40 r45
  text "IO_6" at 4791.89,1555.61 h40 r45
  text "+5/3v3" at 4791.86,1450.29 h40 r45
  text "5TE_4" at 4641.27,1410 h80 r90
  text "+5V" at 2304.39,1265 h60 r90
  text "AD_0" at 3931.89,1178.11 h40 r45
  text "AD_1" at 4030.89,1178.11 h40 r45
  text "AD_2" at 4129.89,1178.11 h40 r45
  text "AD_3" at 4228.89,1178.11 h40 r45
  text "NC" at 3044.71,1175.29 h40 r45
  text "+5v/3v3" at 3134.71,1175.29 h40 r45
  text "RES" at 3235.55,1175.29 h40 r45
  text "+3v3" at 3336.38,1175.29 h40 r45
  text "+5v" at 3437.21,1175.29 h40 r45
  text "GND" at 3538.05,1175.29 h40 r45
  text "GND" at 3638.88,1175.29 h40 r45
  text "NC" at 3739.71,1175.29 h40 r45
  text "SDA" at 4330.71,1175.29 h40 r45
  text "SCL" at 4429.71,1175.29 h40 r45
  text "+3V3" at 2304.39,1085 h60 r90
  text "Power select" at 2379.34,1080 h65 r90

## Text inside footprints (layer, text, board x,y; h text height)
C1: Top Overlay "+" at 1494.68,1890.94 h48 r90
C2: Top Overlay "+" at 1494.68,1440.94 h48 r90
J7: Assembly Notes "PCB Edge" at 995.08,2051.18 h16 r270
J8: Top Overlay "GND" at 4359.08,2940.77 h40 r90; Top Overlay "VIN" at 4459.79,2947.43 h40 r90; Top Overlay "GND" at 4159.79,4100.76 h40 r90; Top Overlay "RX" at 4359.79,4100.76 h40 r90; Top Overlay "TX" at 4459.79,4100.76 h40 r90; Top Overlay "D8" at 3459.79,4100.76 h40 r90; Top Overlay "D9" at 3359.79,4100.76 h40 r90; Top Overlay "RES" at 4258.36,2940.77 h40 r90; Top Overlay "A7" at 4056.93,2980.75 h40 r90; Top Overlay "5V" at 4157.65,2980.75 h40 r90; Top Overlay "A6" at 3956.22,2980.75 h40 r90; Top Overlay "A4" at 3754.79,2980.75 h40 r90; Top Overlay "A5" at 3855.51,2980.75 h40 r90; Top Overlay "A3" at 3654.08,2980.75 h40 r90; Top Overlay "A1" at 3452.65,2994.08 h40 r90; Top Overlay "A2" at 3553.36,2980.75 h40 r90; Top Overlay "A0" at 3351.94,2980.75 h40 r90; Top Overlay "3V3" at 3150.51,2940.76 h40 r90; Top Overlay "REF" at 3251.22,2940.76 h40 r90; Top Overlay "D13" at 3049.79,2947.43 h40 r90; Top Overlay "D3" at 3959.79,4100.76 h40 r90; Top Overlay "D2" at 4059.79,4100.76 h40 r90; Top Overlay "D4" at 3859.79,4100.76 h40 r90; Top Overlay "D6" at 3659.79,4100.76 h40 r90; Top Overlay "D5" at 3759.79,4100.76 h40 r90; Top Overlay "D7" at 3559.79,4100.76 h40 r90; Top Overlay "MOSI" at 3159.79,4100.76 h40 r90; Top Overlay "D10" at 3259.79,4100.76 h40 r90; Top Overlay "MISO" at 3059.79,4100.76 h40 r90; Top Overlay "RES" at 4259.79,4100.76 h40 r90